# Altium PCB FRONT-UNIT-7_1.PcbDoc (part 2 of 3)
Units mm, origin at the board's own origin, x right, y up, seen from the top; angles counter-clockwise.
Board outline 280 x 128 mm, 2 copper layers (Top Layer, Top, Bottom Layer, Bottom), stack 1.671 mm thick; 140 components, 117 nets, 608 pads, 1302 vias.
Unrouted connection lines stored in the file: 26.
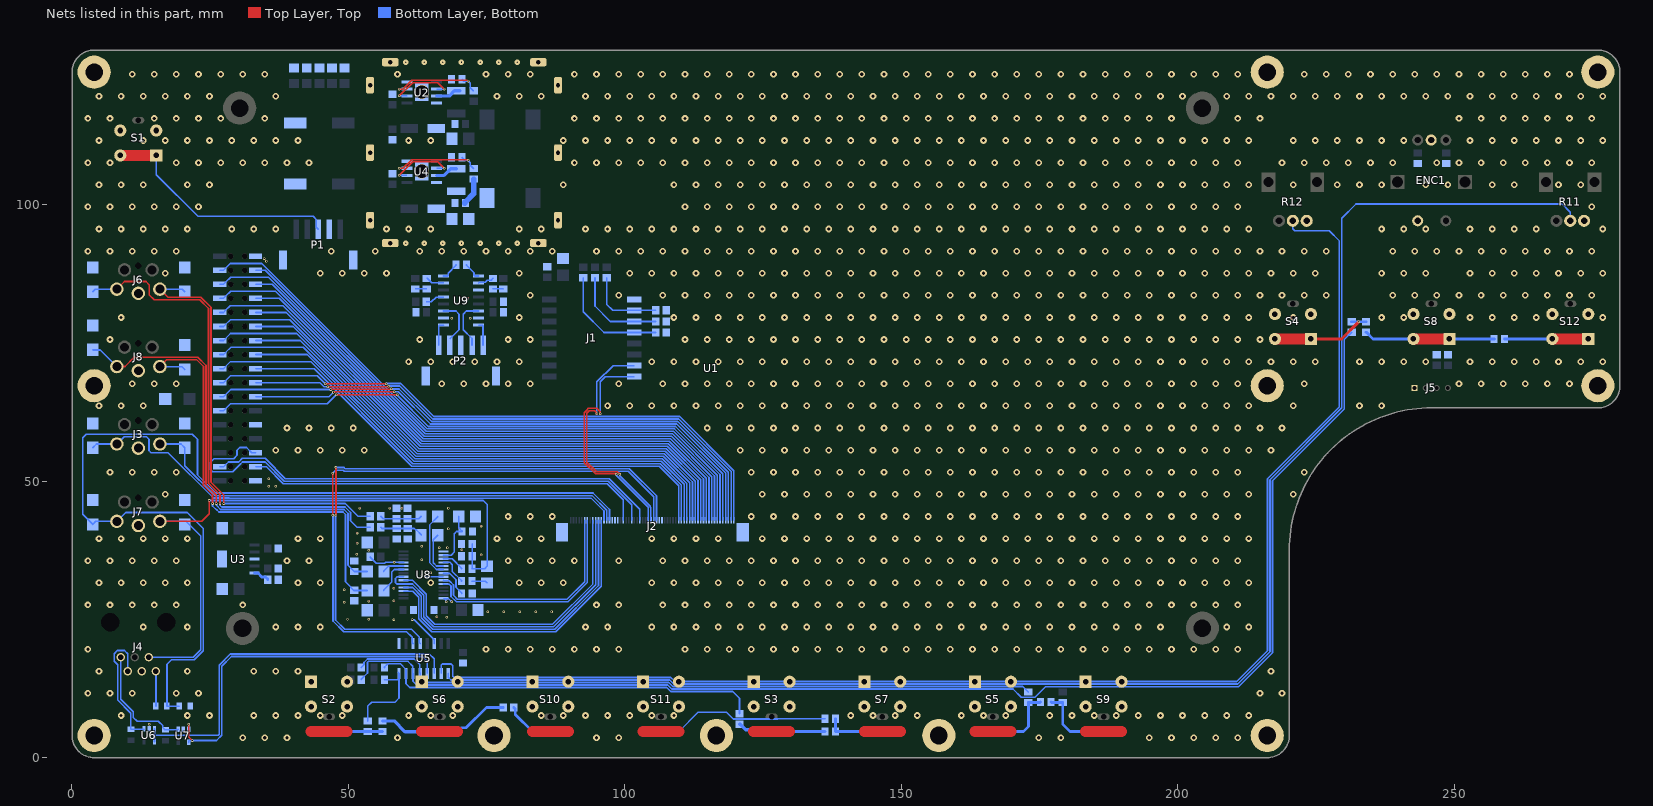
[diagram p2: the nets of this part, all layers, seen from the top]

## Via types
v1: diameter 1.2, hole 0.6, Top Layer, Top to Bottom Layer, Bottom, tented both sides, 1155 vias
v2: diameter 0.45, hole 0.25, Top Layer, Top to Bottom Layer, Bottom, tented both sides, 133 vias
v3: diameter 1, hole 0.25, Top Layer, Top to Bottom Layer, Bottom, tented both sides, 14 vias

## Nets (pads, with @x,y where several pads share a name; then routed paths per layer and width w, separated by ;. In a path a pad name is that pad's centre, name@x,y a point inside that pad or via, vN(x,y) a via of type N, cw(c..) or ccw(c..) an arc to the next point about the centre after c; other vN are vias at no path point) (continued)
GND: C1.2 C2.2 C3.2 C4.2 C5.2 C6.2 C7.2 C8.1 C9.1 C10.2 C11.2 C12.1 C13.1 C14.2 C15.1 C16.2 C17.2 C18.1 C19.1 C20.1 C21.2 C22.2 C23.1 C24.1 C25.1 C26.1 C27.1 C28.1 C29.1 C30.2 C31.2 C33.2 C34.1 C36.1 C37.1 C38.1 C39.2 C41.1 C42.2 C43.1 C46.2 C47.2 C50.2 C51.2 D1.2 D2.2 D3.2 D4.2 D5.2 D6.2 D7.2 D8.2 D9.2 ENC1.1 ENC1.4 J1.9 J2.27 J2.28 J2.43 J2.44 J2.45 J2.61 J2.62 J3.2 J4.3 J5.1 J6.2 J7.2 J8.2 P1.2 P1.MP1 P1.MP2 P2.3 P2.MP1 P2.MP2 pad. pad.7 R1.1 R6.2 R7.2 R8.2 R9.1 R11.3 R12.3 R32.1 R35.1 R36.1 R39.1 R40.1 R41.1 S1.3 S1.4 S2.3 S2.4 S3.3 S3.4 S4.3 S4.4 S5.3 S5.4 S6.3 S6.4 S7.3 S7.4 S8.3 S8.4 S9.3 S9.4 S10.3 S10.4 S11.3 S11.4 S12.3 S12.4 U1.2 U1.26 U1.34 U2.4 U2.8 U2.9 U3.3 U3.6 U4.4 U4.8 U4.9 U5.9 U5.14 U6.2 U7.2 U8.11 U8.15 U8.22 U8.28 U9.2 U9.9 U9.11 U9.15 | length 21.6
  Bottom Layer, Bottom w0.3: C38.1@53.959,36.334 53.959,36.234 55.039,35.154 56.546,35.154 56.723,35.331 v2(58.268,35.331) 58.269,35.333 59.982,35.333 U8.11@59.983,35.334 ; v2(61.519,24.994) 61.547,24.965 61.9,24.965 65.507,21.358 U5.14@65.507,20.658 ; 64.135,32.791 64.192,32.734 U8.22@67.183,32.734 ; U8.28@67.233,28.784 U8.28@67.633,28.784 ; v2(67.716,28.194) 67.716,28.235 67.633,28.318 U8.28@67.633,28.784 ; v2(68.682,28.194) 68.091,28.784 U8.28@67.633,28.784 ; C51.2@71.356,89.154 71.356,89.054 72.712,87.698 72.712,87.296 72.862,87.146 U9.9@73.562,87.146
  other v1: 30.881,3.638 34.881,3.638 38.881,3.638 58.881,3.638 94.881,3.638 98.881,3.638 174.881,3.638 178.881,3.638 194.881,3.638 198.881,3.638 202.881,3.638 206.881,3.638 210.881,3.638 8.881,7.638 20.881,7.638 24.881,7.638 32.881,7.638 36.881,7.638 40.881,7.638 44.881,7.638 48.881,7.638 60.881,7.638 64.881,7.638 68.881,7.638 84.881,7.638 88.881,7.638 92.881,7.638 96.881,7.638 100.881,7.638 104.881,7.638 108.881,7.638 140.881,7.638 144.881,7.638 148.881,7.638 152.881,7.638 160.881,7.638 164.881,7.638 168.881,7.638 176.881,7.638 180.881,7.638 184.881,7.638 188.881,7.638 192.881,7.638 196.881,7.638 200.881,7.638 204.881,7.638 208.881,7.638 212.881,7.638 2.881,11.638 6.881,11.638 10.881,11.638 18.881,11.638 22.881,11.638 214.881,11.638 218.881,11.638 4.881,15.638 20.881,15.638 32.881,15.638 36.881,15.638 40.881,15.638 216.881,15.638 2.881,19.638 74.881,19.638 78.881,19.638 82.881,19.638 86.881,19.638 90.881,19.638 94.881,19.638 98.881,19.638 110.881,19.638 114.881,19.638 118.881,19.638 122.881,19.638 126.881,19.638 130.881,19.638 134.881,19.638 138.881,19.638 142.881,19.638 146.881,19.638 150.881,19.638 154.881,19.638 158.881,19.638 162.881,19.638 166.881,19.638 170.881,19.638 174.881,19.638 178.881,19.638 182.881,19.638 186.881,19.638 190.881,19.638 194.881,19.638 198.881,19.638 202.881,19.638 206.881,19.638 210.881,19.638 12.881,23.638 20.881,23.638 36.881,23.638 40.881,23.638 44.881,23.638 92.881,23.638 96.881,23.638 104.881,23.638 108.881,23.638 112.881,23.638 116.881,23.638 120.881,23.638 124.881,23.638 128.881,23.638 132.881,23.638 136.881,23.638 140.881,23.638 144.881,23.638 148.881,23.638 152.881,23.638 156.881,23.638 160.881,23.638 164.881,23.638 168.881,23.638 172.881,23.638 176.881,23.638 180.881,23.638 184.881,23.638 188.881,23.638 192.881,23.638 196.881,23.638 208.881,23.638 212.881,23.638 2.881,27.638 6.881,27.638 10.881,27.638 14.881,27.638 18.881,27.638 30.881,27.638 94.881,27.638 98.881,27.638 106.881,27.638 110.881,27.638 114.881,27.638 118.881,27.638 122.881,27.638 126.881,27.638 130.881,27.638 134.881,27.638 138.881,27.638 142.881,27.638 146.881,27.638 150.881,27.638 154.881,27.638 158.881,27.638 162.881,27.638 166.881,27.638 170.881,27.638 174.881,27.638 178.881,27.638 182.881,27.638 186.881,27.638 190.881,27.638 194.881,27.638 198.881,27.638 202.881,27.638 206.881,27.638 210.881,27.638 4.881,31.638 8.881,31.638 12.881,31.638 16.881,31.638 20.881,31.638 40.881,31.638 44.881,31.638 64.881,31.638 80.881,31.638 84.881,31.638 88.881,31.638 104.881,31.638 108.881,31.638 112.881,31.638 116.881,31.638 120.881,31.638 124.881,31.638 128.881,31.638 132.881,31.638 136.881,31.638 140.881,31.638 144.881,31.638 148.881,31.638 152.881,31.638 156.881,31.638 160.881,31.638 164.881,31.638 168.881,31.638 172.881,31.638 176.881,31.638 180.881,31.638 184.881,31.638 188.881,31.638 192.881,31.638 196.881,31.638 200.881,31.638 204.881,31.638 208.881,31.638 212.881,31.638 2.881,35.638 6.881,35.638 10.881,35.638 14.881,35.638 18.881,35.638 38.881,35.638 42.881,35.638 78.881,35.638 82.881,35.638 86.881,35.638 90.881,35.638 98.881,35.638 106.881,35.638 110.881,35.638 114.881,35.638 118.881,35.638 122.881,35.638 126.881,35.638 130.881,35.638 134.881,35.638 138.881,35.638 142.881,35.638 146.881,35.638 150.881,35.638 154.881,35.638 158.881,35.638 162.881,35.638 166.881,35.638 170.881,35.638 174.881,35.638 178.881,35.638 182.881,35.638 186.881,35.638 190.881,35.638 194.881,35.638 198.881,35.638 202.881,35.638 206.881,35.638 210.881,35.638 4.881,39.638 8.881,39.638 12.881,39.638 16.881,39.638 20.881,39.638 40.881,39.638 44.881,39.638 76.881,39.638 80.881,39.638 84.881,39.638 104.881,39.638 108.881,39.638 112.881,39.638 116.881,39.638 124.881,39.638 128.881,39.638 132.881,39.638 136.881,39.638 140.881,39.638 144.881,39.638 148.881,39.638 152.881,39.638 156.881,39.638 160.881,39.638 164.881,39.638 168.881,39.638 172.881,39.638 176.881,39.638 180.881,39.638 184.881,39.638 188.881,39.638 192.881,39.638 196.881,39.638 200.881,39.638 204.881,39.638 208.881,39.638 212.881,39.638 78.881,43.638 82.881,43.638 86.881,43.638 122.881,43.638 126.881,43.638 130.881,43.638 134.881,43.638 138.881,43.638 142.881,43.638 146.881,43.638 150.881,43.638 154.881,43.638 158.881,43.638 162.881,43.638 166.881,43.638 170.881,43.638 174.881,43.638 178.881,43.638 182.881,43.638 186.881,43.638 190.881,43.638 194.881,43.638 198.881,43.638 202.881,43.638 206.881,43.638 210.881,43.638 16.881,47.638 124.881,47.638 128.881,47.638 132.881,47.638 136.881,47.638 140.881,47.638 144.881,47.638 148.881,47.638 152.881,47.638 156.881,47.638 160.881,47.638 164.881,47.638 168.881,47.638 172.881,47.638 176.881,47.638 180.881,47.638 184.881,47.638 188.881,47.638 192.881,47.638 196.881,47.638 200.881,47.638 204.881,47.638 208.881,47.638 212.881,47.638 220.881,47.638 6.881,51.638 10.881,51.638 14.881,51.638 18.881,51.638 122.881,51.638 126.881,51.638 130.881,51.638 134.881,51.638 138.881,51.638 142.881,51.638 146.881,51.638 150.881,51.638 154.881,51.638 158.881,51.638 162.881,51.638 166.881,51.638 170.881,51.638 174.881,51.638 178.881,51.638 182.881,51.638 186.881,51.638 190.881,51.638 194.881,51.638 198.881,51.638 202.881,51.638 206.881,51.638 210.881,51.638 222.881,51.638 36.881,55.638 40.881,55.638 44.881,55.638 48.881,55.638 52.881,55.638 120.881,55.638 124.881,55.638 128.881,55.638 132.881,55.638 136.881,55.638 140.881,55.638 144.881,55.638 148.881,55.638 152.881,55.638 156.881,55.638 160.881,55.638 164.881,55.638 168.881,55.638 172.881,55.638 176.881,55.638 180.881,55.638 184.881,55.638 188.881,55.638 192.881,55.638 196.881,55.638 200.881,55.638 204.881,55.638 208.881,55.638 212.881,55.638 216.881,55.638 38.881,59.638 42.881,59.638 46.881,59.638 50.881,59.638 114.881,59.638 118.881,59.638 122.881,59.638 126.881,59.638 130.881,59.638 134.881,59.638 138.881,59.638 142.881,59.638 146.881,59.638 150.881,59.638 154.881,59.638 158.881,59.638 162.881,59.638 166.881,59.638 170.881,59.638 174.881,59.638 178.881,59.638 182.881,59.638 186.881,59.638 190.881,59.638 194.881,59.638 198.881,59.638 202.881,59.638 206.881,59.638 210.881,59.638 214.881,59.638 218.881,59.638 4.881,63.638 8.881,63.638 12.881,63.638 96.881,63.638 100.881,63.638 104.881,63.638 108.881,63.638 112.881,63.638 116.881,63.638 120.881,63.638 124.881,63.638 128.881,63.638 132.881,63.638 136.881,63.638 140.881,63.638 144.881,63.638 148.881,63.638 152.881,63.638 156.881,63.638 160.881,63.638 164.881,63.638 168.881,63.638 172.881,63.638 176.881,63.638 180.881,63.638 184.881,63.638 188.881,63.638 192.881,63.638 196.881,63.638 200.881,63.638 204.881,63.638 208.881,63.638 212.881,63.638 220.881,63.638 232.881,63.638 236.881,63.638 10.881,67.638 14.881,67.638 18.881,67.638 66.881,67.638 70.881,67.638 74.881,67.638 78.881,67.638 82.881,67.638 98.881,67.638 106.881,67.638 110.881,67.638 114.881,67.638 118.881,67.638 122.881,67.638 126.881,67.638 130.881,67.638 134.881,67.638 138.881,67.638 142.881,67.638 146.881,67.638 150.881,67.638 154.881,67.638 158.881,67.638 162.881,67.638 166.881,67.638 170.881,67.638 174.881,67.638 178.881,67.638 182.881,67.638 186.881,67.638 190.881,67.638 194.881,67.638 198.881,67.638 202.881,67.638 206.881,67.638 210.881,67.638 222.881,67.638 250.881,67.638 254.881,67.638 258.881,67.638 262.881,67.638 266.881,67.638 270.881,67.638 60.881,71.638 64.881,71.638 68.881,71.638 72.881,71.638 76.881,71.638 80.881,71.638 104.881,71.638 108.881,71.638 112.881,71.638 116.881,71.638 120.881,71.638 124.881,71.638 128.881,71.638 132.881,71.638 136.881,71.638 140.881,71.638 144.881,71.638 148.881,71.638 152.881,71.638 156.881,71.638 160.881,71.638 164.881,71.638 168.881,71.638 172.881,71.638 176.881,71.638 180.881,71.638 184.881,71.638 188.881,71.638 192.881,71.638 196.881,71.638 200.881,71.638 204.881,71.638 208.881,71.638 212.881,71.638 216.881,71.638 220.881,71.638 224.881,71.638 232.881,71.638 236.881,71.638 240.881,71.638 244.881,71.638 252.881,71.638 256.881,71.638 260.881,71.638 264.881,71.638 268.881,71.638 272.881,71.638 276.881,71.638 6.881,75.638 62.881,75.638 78.881,75.638 82.881,75.638 110.881,75.638 114.881,75.638 118.881,75.638 122.881,75.638 126.881,75.638 130.881,75.638 134.881,75.638 138.881,75.638 142.881,75.638 146.881,75.638 150.881,75.638 154.881,75.638 158.881,75.638 162.881,75.638 166.881,75.638 170.881,75.638 174.881,75.638 178.881,75.638 182.881,75.638 186.881,75.638 190.881,75.638 194.881,75.638 198.881,75.638 202.881,75.638 206.881,75.638 210.881,75.638 214.881,75.638 8.881,79.638 80.881,79.638 108.881,79.638 112.881,79.638 116.881,79.638 120.881,79.638 124.881,79.638 128.881,79.638 132.881,79.638 136.881,79.638 140.881,79.638 144.881,79.638 148.881,79.638 152.881,79.638 156.881,79.638 160.881,79.638 164.881,79.638 168.881,79.638 172.881,79.638 176.881,79.638 180.881,79.638 184.881,79.638 188.881,79.638 192.881,79.638 196.881,79.638 200.881,79.638 204.881,79.638 208.881,79.638 212.881,79.638 220.881,79.638 236.881,79.638 240.881,79.638 252.881,79.638 256.881,79.638 260.881,79.638 264.881,79.638 276.881,79.638 82.881,83.638 98.881,83.638 106.881,83.638 110.881,83.638 114.881,83.638 118.881,83.638 122.881,83.638 126.881,83.638 130.881,83.638 134.881,83.638 138.881,83.638 142.881,83.638 146.881,83.638 150.881,83.638 154.881,83.638 158.881,83.638 162.881,83.638 166.881,83.638 170.881,83.638 174.881,83.638 178.881,83.638 182.881,83.638 186.881,83.638 190.881,83.638 194.881,83.638 198.881,83.638 202.881,83.638 206.881,83.638 210.881,83.638 214.881,83.638 218.881,83.638 222.881,83.638 226.881,83.638 238.881,83.638 242.881,83.638 246.881,83.638 250.881,83.638 254.881,83.638 258.881,83.638 262.881,83.638 266.881,83.638 270.881,83.638 274.881,83.638 16.881,87.638 44.881,87.638 48.881,87.638 52.881,87.638 56.881,87.638 80.881,87.638 100.881,87.638 104.881,87.638 108.881,87.638 112.881,87.638 116.881,87.638 120.881,87.638 124.881,87.638 128.881,87.638 132.881,87.638 136.881,87.638 140.881,87.638 144.881,87.638 148.881,87.638 152.881,87.638 156.881,87.638 160.881,87.638 164.881,87.638 168.881,87.638 172.881,87.638 176.881,87.638 180.881,87.638 184.881,87.638 188.881,87.638 192.881,87.638 196.881,87.638 200.881,87.638 204.881,87.638 208.881,87.638 212.881,87.638 216.881,87.638 220.881,87.638 224.881,87.638 236.881,87.638 240.881,87.638 244.881,87.638 252.881,87.638 256.881,87.638 260.881,87.638 264.881,87.638 268.881,87.638 272.881,87.638 276.881,87.638 2.881,91.638 6.881,91.638 10.881,91.638 14.881,91.638 18.881,91.638 46.881,91.638 54.881,91.638 62.881,91.638 66.881,91.638 70.881,91.638 74.881,91.638 78.881,91.638 82.881,91.638 86.881,91.638 94.881,91.638 98.881,91.638 102.881,91.638 106.881,91.638 110.881,91.638 114.881,91.638 118.881,91.638 122.881,91.638 126.881,91.638 130.881,91.638 134.881,91.638 138.881,91.638 142.881,91.638 146.881,91.638 150.881,91.638 154.881,91.638 158.881,91.638 162.881,91.638 166.881,91.638 170.881,91.638 174.881,91.638 178.881,91.638 182.881,91.638 186.881,91.638 190.881,91.638 194.881,91.638 198.881,91.638 202.881,91.638 206.881,91.638 210.881,91.638 214.881,91.638 218.881,91.638 222.881,91.638 226.881,91.638 238.881,91.638 242.881,91.638 246.881,91.638 250.881,91.638 254.881,91.638 258.881,91.638 262.881,91.638 266.881,91.638 270.881,91.638 274.881,91.638 4.881,95.638 8.881,95.638 12.881,95.638 16.881,95.638 20.881,95.638 28.881,95.638 32.881,95.638 36.881,95.638 56.881,95.638 60.881,95.638 64.881,95.638 80.881,95.638 84.881,95.638 92.881,95.638 96.881,95.638 100.881,95.638 104.881,95.638 108.881,95.638 112.881,95.638 116.881,95.638 120.881,95.638 124.881,95.638 128.881,95.638 132.881,95.638 136.881,95.638 140.881,95.638 144.881,95.638 148.881,95.638 152.881,95.638 156.881,95.638 160.881,95.638 164.881,95.638 168.881,95.638 172.881,95.638 176.881,95.638 180.881,95.638 184.881,95.638 188.881,95.638 192.881,95.638 196.881,95.638 200.881,95.638 204.881,95.638 208.881,95.638 212.881,95.638 236.881,95.638 240.881,95.638 244.881,95.638 252.881,95.638 256.881,95.638 260.881,95.638 264.881,95.638 276.881,95.638 2.881,99.638 6.881,99.638 10.881,99.638 14.881,99.638 18.881,99.638 22.881,99.638 110.881,99.638 114.881,99.638 118.881,99.638 122.881,99.638 126.881,99.638 130.881,99.638 134.881,99.638 138.881,99.638 142.881,99.638 146.881,99.638 150.881,99.638 154.881,99.638 158.881,99.638 162.881,99.638 166.881,99.638 170.881,99.638 174.881,99.638 178.881,99.638 182.881,99.638 186.881,99.638 190.881,99.638 194.881,99.638 198.881,99.638 202.881,99.638 206.881,99.638 210.881,99.638 274.881,99.638 4.881,103.638 8.881,103.638 12.881,103.638 20.881,103.638 24.881,103.638 88.881,103.638 108.881,103.638 112.881,103.638 116.881,103.638 120.881,103.638 124.881,103.638 128.881,103.638 132.881,103.638 136.881,103.638 140.881,103.638 144.881,103.638 148.881,103.638 152.881,103.638 156.881,103.638 160.881,103.638 164.881,103.638 168.881,103.638 172.881,103.638 176.881,103.638 180.881,103.638 184.881,103.638 188.881,103.638 192.881,103.638 196.881,103.638 200.881,103.638 204.881,103.638 208.881,103.638 212.881,103.638 220.881,103.638 228.881,103.638 232.881,103.638 236.881,103.638 244.881,103.638 248.881,103.638 256.881,103.638 260.881,103.638 268.881,103.638 272.881,103.638 2.881,107.638 6.881,107.638 18.881,107.638 22.881,107.638 26.881,107.638 30.881,107.638 34.881,107.638 38.881,107.638 42.881,107.638 90.881,107.638 94.881,107.638 98.881,107.638 102.881,107.638 106.881,107.638 110.881,107.638 114.881,107.638 118.881,107.638 122.881,107.638 126.881,107.638 130.881,107.638 134.881,107.638 138.881,107.638 142.881,107.638 146.881,107.638 150.881,107.638 154.881,107.638 158.881,107.638 162.881,107.638 166.881,107.638 170.881,107.638 174.881,107.638 178.881,107.638 182.881,107.638 186.881,107.638 190.881,107.638 194.881,107.638 198.881,107.638 202.881,107.638 206.881,107.638 210.881,107.638 218.881,107.638 222.881,107.638 226.881,107.638 230.881,107.638 234.881,107.638 238.881,107.638 246.881,107.638 250.881,107.638 254.881,107.638 258.881,107.638 262.881,107.638 266.881,107.638 270.881,107.638 274.881,107.638 4.881,111.638 12.881,111.638 16.881,111.638 20.881,111.638 24.881,111.638 28.881,111.638 32.881,111.638 36.881,111.638 40.881,111.638 60.881,111.638 64.881,111.638 88.881,111.638 92.881,111.638 96.881,111.638 100.881,111.638 104.881,111.638 108.881,111.638 112.881,111.638 116.881,111.638 120.881,111.638 124.881,111.638 128.881,111.638 132.881,111.638 136.881,111.638 140.881,111.638 144.881,111.638 148.881,111.638 152.881,111.638 156.881,111.638 160.881,111.638 164.881,111.638 168.881,111.638 172.881,111.638 176.881,111.638 180.881,111.638 184.881,111.638 188.881,111.638 192.881,111.638 196.881,111.638 200.881,111.638 204.881,111.638 208.881,111.638 212.881,111.638 220.881,111.638 224.881,111.638 228.881,111.638 232.881,111.638 236.881,111.638 240.881,111.638 252.881,111.638 256.881,111.638 260.881,111.638 264.881,111.638 268.881,111.638 272.881,111.638 276.881,111.638 2.881,115.638 6.881,115.638 14.881,115.638 18.881,115.638 22.881,115.638 26.881,115.638 34.881,115.638 90.881,115.638 94.881,115.638 98.881,115.638 102.881,115.638 106.881,115.638 110.881,115.638 114.881,115.638 118.881,115.638 122.881,115.638 126.881,115.638 130.881,115.638 134.881,115.638 138.881,115.638 142.881,115.638 146.881,115.638 150.881,115.638 154.881,115.638 158.881,115.638 162.881,115.638 166.881,115.638 170.881,115.638 174.881,115.638 178.881,115.638 182.881,115.638 186.881,115.638 190.881,115.638 194.881,115.638 198.881,115.638 210.881,115.638 214.881,115.638 250.881,115.638 254.881,115.638 258.881,115.638 262.881,115.638 266.881,115.638 270.881,115.638 274.881,115.638 4.881,119.638 8.881,119.638 12.881,119.638 16.881,119.638 20.881,119.638 24.881,119.638 36.881,119.638 76.881,119.638 80.881,119.638 84.881,119.638 92.881,119.638 96.881,119.638 100.881,119.638 104.881,119.638 108.881,119.638 112.881,119.638 116.881,119.638 120.881,119.638 124.881,119.638 128.881,119.638 132.881,119.638 136.881,119.638 140.881,119.638 144.881,119.638 148.881,119.638 152.881,119.638 156.881,119.638 160.881,119.638 164.881,119.638 168.881,119.638 172.881,119.638 176.881,119.638 180.881,119.638 184.881,119.638 188.881,119.638 192.881,119.638 196.881,119.638 200.881,119.638 208.881,119.638 212.881,119.638 216.881,119.638 220.881,119.638 224.881,119.638 228.881,119.638 232.881,119.638 236.881,119.638 240.881,119.638 244.881,119.638 248.881,119.638 252.881,119.638 256.881,119.638 260.881,119.638 264.881,119.638 268.881,119.638 272.881,119.638 276.881,119.638 10.881,123.638 14.881,123.638 18.881,123.638 22.881,123.638 26.881,123.638 30.881,123.638 34.881,123.638 58.881,123.638 74.881,123.638 78.881,123.638 82.881,123.638 90.881,123.638 94.881,123.638 98.881,123.638 102.881,123.638 106.881,123.638 110.881,123.638 114.881,123.638 118.881,123.638 122.881,123.638 126.881,123.638 130.881,123.638 134.881,123.638 138.881,123.638 142.881,123.638 146.881,123.638 150.881,123.638 154.881,123.638 158.881,123.638 162.881,123.638 166.881,123.638 170.881,123.638 174.881,123.638 178.881,123.638 182.881,123.638 186.881,123.638 190.881,123.638 194.881,123.638 198.881,123.638 202.881,123.638 206.881,123.638 210.881,123.638 222.881,123.638 226.881,123.638 230.881,123.638 234.881,123.638 238.881,123.638 242.881,123.638 246.881,123.638 250.881,123.638 254.881,123.638 258.881,123.638 262.881,123.638 266.881,123.638 270.881,123.638
  other v2: 13.995,6.071 58.242,24.994 49.835,25.019 53.696,25.019 67.793,25.375 66.015,25.476 75.235,26.416 78.111,26.416 80.988,26.416 83.864,26.416 86.741,26.416 49.251,28.143 53.696,28.346 58.242,28.372 49.251,30.353 58.242,30.632 63.297,32.918 64.897,33.426 63.297,35.789 74.016,36.678 51.537,36.779 53.67,37.541 70.536,37.617 66.421,37.948 67.92,37.948 63.297,38.252 51.562,38.811 51.562,40.64 68.097,41.402 73.99,41.91 59.69,45.136 68.097,45.136 52.019,45.161 57.48,45.161 35.585,49.098 36.855,49.098 35.585,50.495 68.707,79.502 72.06,79.502 71.628,83.083 35.179,89.814 34.798,90.297
  other v3: 60.339,93.091 63.71,93.091 67.08,93.091 70.451,93.091 73.822,93.091 77.193,93.091 80.564,93.091 60.339,125.808 63.71,125.808 67.08,125.808 70.451,125.808 73.822,125.808 77.193,125.808 80.564,125.808
HEADPHONE_L: C44.2 D9.1 J8.3 R40.2 | length 81.1
  Top Layer, Top w0.3: J8.3@15.9,70.75 17.166,72.016 22.536,72.016 23.796,70.756 23.796,49.25 25.425,47.621 v2(25.425,45.974)
  Bottom Layer, Bottom w0.3: J8.3@15.9,70.75 19.875,70.75 D9.1@20.4,70.225 ; v2(25.425,45.974) 25.425,45.542 26.162,44.806 26.237,44.806 26.585,44.457 49.015,44.457 49.479,43.993 49.479,31.838 50.433,30.884 50.433,30.784 50.983,30.234 C44.2@53.408,30.234
HEADPHONE_R: C45.2 D8.1 J8.6 R41.2 | length 86.9
  Top Layer, Top w0.3: J8.6@8.1,70.75 8.128,70.778 9.589,70.778 11.278,72.466 22.722,72.466 24.246,70.942 24.246,49.437 26.111,47.571 v2(26.111,45.974)
  Bottom Layer, Bottom w0.3: D8.1@3.759,73.797 3.814,73.742 5.108,73.742 J8.6@8.1,70.75 ; v2(26.111,45.974) 26.14,45.945 26.14,45.639 26.872,44.907 49.201,44.907 49.929,44.179 49.929,34.813 R41.2@51.046,33.697 ; R41.2@51.033,33.709 51.058,33.684 C45.2@53.408,33.684
KEY_IN_DASH: D2.1 J2.48 J3.6 | length 101.7
  Bottom Layer, Bottom w0.3: D2.1@3.75,56.075 4.425,56.75 J3.6@8.1,56.75 9.425,58.075 13.475,58.075 13.925,57.625 13.925,55.575 14.365,55.135 17.433,55.135 25.603,46.965 28.397,46.965 ; 28.397,46.965 93.885,46.965 96.225,44.625 J2.48@96.225,42.962
KEY_IN_DOT: D3.1 J2.47 J3.3 | length 89.5
  Bottom Layer, Bottom w0.3: J3.3@15.9,56.75 19.725,56.75 D3.1@20.4,56.075 20.4,52.814 25.799,47.415 94.071,47.415 96.725,44.761 J2.47@96.725,42.962
L+: P2.5 U9.1 | length 4.4
  Bottom Layer, Bottom w0.3: P2.5@66.358,74.582 66.358,78.102 66.512,78.256 U9.1@67.212,78.256
L-: P2.4 U9.3 | length 8.1
  Bottom Layer, Bottom w0.3: U9.3@67.213,80.797 69.45,80.797 70.009,80.239 70.009,77.426 P2.4@68.416,75.832
LINEIN_L: D6.1 J6.3 R33.1 | length 79.2
  Top Layer, Top w0.3: J6.3@15.9,84.75 17.363,83.287 23.317,83.287 25.146,81.458 25.146,49.809 27.432,47.523 v2(27.432,45.974)
  Bottom Layer, Bottom w0.3: J6.3@15.9,84.75 19.925,84.75 D6.1@20.4,84.275 ; v2(27.432,45.974) 49.407,45.974 51.722,43.659 R33.1@53.933,43.659
LINEIN_R: D5.1 J6.6 R34.1 | length 90.9
  Top Layer, Top w0.3: J6.6@8.1,84.75 9.481,86.131 13.386,86.131 13.995,85.522 13.995,83.693 14.859,82.829 23.121,82.829 24.696,81.255 24.696,49.623 26.772,47.547 v2(26.772,45.974)
  Bottom Layer, Bottom w0.3: D5.1@3.75,84.275 4.225,84.75 J6.6@8.1,84.75 ; v2(26.772,45.974) 26.772,45.644 27.058,45.357 49.388,45.357 50.379,44.366 50.379,42.89 51.56,41.709 R34.1@53.933,41.709
MIC: C40.2 C43.2 D7.1 J4.2 J7.3 R38.1 R39.2 | length 120
  Top Layer, Top w0.3: J7.3@15.9,42.75 23.471,42.75 24.841,44.12 v2(24.841,46.533)
  Bottom Layer, Bottom w0.3: J4.2@13.894,18.182 21.924,18.182 23.275,19.533 23.275,40.1 20.625,42.75 J7.3@15.9,42.75 ; v2(24.841,46.533) 24.859,46.515 74.415,46.515 75.082,45.847 C40.2@75.082,34.635 ; R39.2@72.383,38.669 72.383,34.214 R38.1@72.358,34.189 74.638,34.189 C40.2@75.083,34.634
MISO: J2.29 U5.12 | length 109.8
  Top Layer, Top w0.3: v2(47.752,43.891) v2(47.752,52.5)
  Bottom Layer, Bottom w0.3: v2(47.752,43.891) 47.752,43.851 47.669,43.767 47.669,24.923 49.344,23.248 61.41,23.248 62.817,21.842 62.817,20.808 U5.12@62.967,20.658 ; v2(47.752,52.5) 49.202,52.5 49.427,52.275 100.809,52.275 105.725,47.359 J2.29@105.725,42.962
MOSI: J2.30 U5.11 | length 108
  Top Layer, Top w0.3: v2(47.142,43.891) v2(47.142,51.45)
  Bottom Layer, Bottom w0.3: v2(47.142,43.891) 47.142,43.851 47.219,43.774 47.219,24.737 49.157,22.798 60.514,22.798 61.547,21.765 61.547,20.808 U5.11@61.697,20.658 ; v2(47.142,51.45) 47.667,51.975 49.077,51.975 49.227,51.825 50.597,51.825 100.623,51.825 105.225,47.223 J2.30@105.225,42.962
NetC19_2: C19.2 U3.5 | length 2.9
  Bottom Layer, Bottom w0.5: U3.5@33.024,33.401 33.624,33.401 34.318,32.707 35,32.707 35.4,32.307 C19.2@35.4,32.207
NetC22_1: C22.1 C23.2 L3.2 L4.2 R10.2 | length 5
  Bottom Layer, Bottom w1: C23.2@71.076,100.33 71.076,100.43 72.669,102.023 R10.2@72.669,104.663
NetC32_1: C32.1 U8.20 | length 12
  Bottom Layer, Bottom w0.3: C32.1@66.158,43.659 66.158,43.559 64.683,42.084 64.683,35.298 65.947,34.034 U8.20@67.183,34.034
NetC32_2: C32.2 C37.2 R33.2 R36.2 | length 7.7
  Bottom Layer, Bottom w0.3: R33.2@55.833,43.659 56.283,43.209 C37.2@60.683,43.209 62.708,43.209 C32.2@63.158,43.659
NetC35_1: C35.1 U8.19 | length 7.4
  Bottom Layer, Bottom w0.3: C35.1@66.158,40.234 65.358,39.434 65.358,35.259 65.933,34.684 U8.19@67.183,34.684
NetC35_2: C35.2 C36.2 R34.2 R35.2 | length 8
  Bottom Layer, Bottom w0.3: R34.2@55.833,41.709 56.083,41.46 C36.2@58.733,41.46 61.933,41.46 62.208,41.184 62.308,41.184 63.158,40.334 C35.2@63.158,40.234
NetC40_1: C40.1 R37.1 | length 2.9
  Bottom Layer, Bottom w0.3: R37.1@72.358,31.949 74.768,31.949 C40.1@75.083,31.634
NetC41_2: C41.2 C42.1 U8.16 | length 10
  Bottom Layer, Bottom w0.3: U8.16@67.183,36.634 68.583,36.634 69.158,37.209 69.158,40.509 69.558,40.909 C41.2@70.533,40.909 70.533,41.009 69.958,41.584 C42.1@69.958,43.659
NetC44_1: C44.1 U8.9 | length 6.3
  Bottom Layer, Bottom w0.3: C44.1@56.408,30.234 56.408,30.334 57.808,31.734 57.808,33.559 58.283,34.034 U8.9@59.983,34.034
NetC45_1: C45.1 U8.10 | length 4
  Bottom Layer, Bottom w0.3: C45.1@56.408,33.684 56.408,33.784 57.308,34.684 U8.10@59.983,34.684
NetC48_1: C48.1 R43.2 | length 2.1
  Bottom Layer, Bottom w0.254: C48.1@62.103,84.8 R43.2@64.16,84.8
NetC49_1: C49.1 R44.2 | length 1.9
  Bottom Layer, Bottom w0.3: R44.2@76.149,84.8 C49.1@78.029,84.8
NetC51_1: C51.1 U9.8 | length 3.3
  Bottom Layer, Bottom w0.3: U9.8@67.212,87.146 67.912,87.146 68.062,87.296 68.062,87.66 69.456,89.054 C51.1@69.456,89.154
NetJ1_10: J1.10 R3.2 R6.1 | length 14.1
  Bottom Layer, Bottom w0.3: R3.2@96.749,86.832 96.749,81.991 97.815,80.924 R6.1@105.578,80.924
NetJ1_11: J1.11 R4.2 R7.1 | length 17.3
  Bottom Layer, Bottom w0.3: R4.2@94.602,86.832 94.602,81.699 97.384,78.918 R7.1@105.578,78.918
NetJ1_12: J1.12 R5.2 R8.1 | length 20.8
  Bottom Layer, Bottom w0.3: R5.2@92.456,86.832 92.456,80.67 96.215,76.911 R8.1@105.578,76.911
NetJ1_15: J1.15 J2.31 | length 42.4
  Top Layer, Top w0.254: v2(94.961,62.25) 94.961,62.303 94.863,62.401 94.863,62.458 94.532,62.789 93.59,62.789 93.155,62.354 93.155,53.479 94.875,51.759 98.658,51.759 99.085,51.332 v2(99.085,51.3)
  Bottom Layer, Bottom w0.254: v2(94.961,62.25) 94.961,67.986 97.895,70.921 J1.15@101.705,70.921 ; v2(99.085,51.3) 99.123,51.262 99.123,51.001 104.629,45.495 104.629,45.282 104.725,45.186 J2.31@104.725,42.962
NetJ1_16: J1.16 J2.32 | length 42.5
  Top Layer, Top w0.254: v2(95.561,62.25) 95.526,62.285 95.526,62.564 94.897,63.193 93.423,63.193 93.088,62.858 93.083,62.858 92.653,62.428 92.653,53.397 94.695,51.355 98.299,51.355 98.397,51.257 v2(98.45,51.257)
  Bottom Layer, Bottom w0.254: v2(95.561,62.25) 95.561,68.015 96.467,68.921 J1.16@101.705,68.921 ; v2(98.45,51.257) 98.488,51.22 98.488,51.064 104.225,45.327 J2.32@104.225,42.962
NetJ2_1: J2.1 U1.19 | length 109.7
  Top Layer, Top w0.3: v2(45.796,67.64) 45.813,67.657 v2(56.845,67.657)
  Bottom Layer, Bottom w0.3: U1.19@26.713,67.842 27.413,67.842 27.783,68.212 27.783,68.215 28.668,69.1 44.336,69.1 v2(45.796,67.64) ; v2(56.845,67.657) 56.874,67.686 57.102,67.686 57.108,67.691 59.452,67.691 65.418,61.725 109.925,61.725 119.725,51.925 J2.1@119.725,42.962
NetJ2_2: J2.2 U1.20 | length 101.6
  Top Layer, Top w0.3: v2(46.279,67.132) 57.25,67.132 57.284,67.166 v2(57.325,67.166)
  Bottom Layer, Bottom w0.3: U1.20@33.213,67.842 44.852,67.842 45.579,67.115 46.262,67.115 v2(46.279,67.132) ; v2(57.325,67.166) 57.354,67.195 57.525,67.195 57.565,67.234 59.272,67.234 65.232,61.275 109.739,61.275 119.225,51.789 J2.2@119.225,42.962
NetJ2_3: J2.3 U1.21 | length 107.5
  Top Layer, Top w0.3: v2(46.838,66.599) 46.866,66.627 47.064,66.627 47.077,66.641 57.674,66.641 57.742,66.709 v2(57.782,66.709)
  Bottom Layer, Bottom w0.3: U1.21@26.713,65.302 27.413,65.302 27.783,65.672 27.783,65.675 28.708,66.6 v2(46.838,66.599) v2(46.838,66.599) ; v2(57.782,66.709) 59.161,66.709 65.045,60.825 109.552,60.825 118.725,51.652 J2.3@118.725,42.962
NetJ2_4: J2.4 U1.22 | length 100
  Top Layer, Top w0.3: v2(47.295,66.116) 47.323,66.145 47.546,66.145 47.585,66.184 v2(58.307,66.184)
  Bottom Layer, Bottom w0.3: U1.22@33.213,65.302 46.481,65.302 v2(47.295,66.116) ; v2(58.307,66.184) 58.333,66.21 59.024,66.21 64.859,60.375 109.366,60.375 118.225,51.516 J2.4@118.225,42.962
NetJ2_5: J2.5 U1.23 | length 106.6
  Top Layer, Top w0.3: v2(47.777,65.634) 47.803,65.659 58.781,65.659 v2(58.807,65.685) ; v2@58.776,65.634 v2@58.798,65.656
  Bottom Layer, Bottom w0.3: U1.23@26.713,62.762 27.413,62.762 27.783,63.132 27.783,63.135 28.682,64.033 46.177,64.033 v2(47.777,65.634) ; v2@58.754,65.632 64.46,59.925 109.179,59.925 117.725,51.379 J2.5@117.725,42.962
NetJ2_6: J2.6 U1.3 | length 115.1
  Bottom Layer, Bottom w0.3: U1.3@26.713,88.162 27.413,88.162 27.783,88.532 27.783,88.535 28.648,89.4 34.349,89.4 64.274,59.475 108.993,59.475 117.225,51.243 J2.6@117.225,42.962
NetJ2_7: J2.7 U1.4 | length 107
  Bottom Layer, Bottom w0.3: U1.4@33.213,88.162 34.95,88.162 64.087,59.025 108.807,59.025 116.725,51.107 J2.7@116.725,42.962
NetJ2_8: J2.8 U1.5 | length 112.9
  Bottom Layer, Bottom w0.3: U1.5@26.713,85.622 27.413,85.622 27.783,85.992 27.783,85.995 28.707,86.919 35.557,86.919 63.901,58.575 108.62,58.575 116.225,50.97 J2.8@116.225,42.962
NetJ2_9: J2.9 U1.6 | length 104.8
  Bottom Layer, Bottom w0.3: U1.6@33.213,85.622 36.218,85.622 63.715,58.125 108.434,58.125 115.725,50.834 J2.9@115.725,42.962
NetJ2_10: J2.10 U1.7 | length 110.7
  Bottom Layer, Bottom w0.3: U1.7@26.713,83.082 27.413,83.082 27.783,83.452 27.783,83.455 28.707,84.379 36.824,84.379 63.528,57.675 108.247,57.675 115.225,50.697 J2.10@115.225,42.962
NetJ2_11: J2.11 U1.8 | length 102.6
  Bottom Layer, Bottom w0.3: U1.8@33.213,83.082 37.485,83.082 63.342,57.225 108.061,57.225 114.725,50.561 J2.11@114.725,42.962
NetJ2_12: J2.12 U1.9 | length 108.5
  Bottom Layer, Bottom w0.3: U1.9@26.713,80.542 27.413,80.542 27.783,80.912 27.783,80.915 28.631,81.763 38.168,81.763 63.155,56.775 107.875,56.775 114.225,50.425 J2.12@114.225,42.962
NetJ2_13: J2.13 U1.10 | length 100.4
  Bottom Layer, Bottom w0.3: U1.10@33.213,80.542 38.752,80.542 62.969,56.325 107.688,56.325 113.725,50.288 J2.13@113.725,42.962
NetJ2_14: J2.14 U1.11 | length 106.3
  Bottom Layer, Bottom w0.3: U1.11@26.713,78.002 27.413,78.002 27.783,78.372 27.783,78.375 28.656,79.248 39.41,79.248 62.783,55.875 107.502,55.875 113.225,50.152 J2.14@113.225,42.962
NetJ2_15: J2.15 U1.12 | length 98.2
  Bottom Layer, Bottom w0.3: U1.12@33.213,78.002 40.019,78.002 62.596,55.425 107.315,55.425 112.725,50.015 J2.15@112.725,42.962
NetJ2_16: J2.16 U1.13 | length 104.1
  Bottom Layer, Bottom w0.3: U1.13@26.713,75.462 27.413,75.462 27.783,75.832 27.783,75.835 28.682,76.733 40.651,76.733 62.41,54.975 107.129,54.975 112.225,49.879 J2.16@112.225,42.962
NetJ2_17: J2.17 U1.14 | length 95.9
  Bottom Layer, Bottom w0.3: U1.14@33.213,75.462 41.286,75.462 62.223,54.525 106.943,54.525 111.725,49.743 J2.17@111.725,42.962
NetJ2_18: J2.18 U1.15 | length 101.9
  Bottom Layer, Bottom w0.3: U1.15@26.713,72.922 27.413,72.922 27.783,73.292 27.783,73.295 28.758,74.27 41.842,74.27 62.037,54.075 106.756,54.075 111.225,49.606 J2.18@111.225,42.962
NetJ2_19: J2.19 U1.16 | length 93.7
  Bottom Layer, Bottom w0.3: U1.16@33.213,72.922 42.554,72.922 61.851,53.625 106.57,53.625 110.725,49.47 J2.19@110.725,42.962
NetJ2_20: J2.20 U1.17 | length 99.7
  Bottom Layer, Bottom w0.3: U1.17@26.713,70.382 27.413,70.382 27.783,70.752 27.783,70.755 28.682,71.653 43.186,71.653 61.664,53.175 106.384,53.175 110.225,49.334 J2.20@110.225,42.962
NetJ2_21: J2.21 U1.18 | length 91.5
  Bottom Layer, Bottom w0.3: U1.18@33.213,70.382 43.821,70.382 61.478,52.725 106.197,52.725 109.725,49.197 J2.21@109.725,42.962
NetJ4_1: J4.1 R25.1 | length 6.3
  Bottom Layer, Bottom w0.3: J4.1@15.164,15.642 15.189,15.617 15.189,9.331 R25.1@15.18,9.322
NetJ4_5: J4.5 R30.1 U6.1 | length 23.4
  Bottom Layer, Bottom w0.3: J4.5@10.084,15.642 10.084,18.796 9.5,19.38 8.179,19.38 7.62,18.821 7.62,17.475 8.28,16.815 8.28,10.439 10.649,8.07 R30.1@10.649,5.157 U6.1@13.02,5.157
NetJ4_6: J4.6 R31.1 U7.1 | length 21.1
  Bottom Layer, Bottom w0.3: J4.6@8.814,18.182 8.814,10.592 9.119,10.287 11.099,8.306 11.099,7.29 11.786,6.604 15.596,6.604 16.445,5.754 16.445,5.414 16.802,5.057 19.087,5.057 U7.1@19.192,5.162
NetL2_1: L2.1 U2.7 | length 4.6
  Bottom Layer, Bottom w0.6: U2.7@65.971,119.685 68.222,119.685 69.18,120.643 L2.1@70.18,120.643
NetL4_1: L4.1 U4.7 | length 4.1
  Bottom Layer, Bottom w0.6: U4.7@65.971,105.329 67.303,105.329 68.52,106.546 L4.1@69.52,106.546
NetR1_2: R1.2 R2.1 U2.3 | length 18.1
  Top Layer, Top w0.254: v2(59.182,120.955) 59.855,120.955 61.455,122.555 71.473,122.555 71.626,122.403 v2(71.679,122.403)
  Bottom Layer, Bottom w0.254: v2(59.182,120.955) U2.3@60.571,120.955 ; R1.2@70.521,122.707 70.825,122.403 v2(71.679,122.403) 71.679,122.35 72.046,121.982 72.046,121.183 72.569,120.66 R2.1@72.669,120.66
NetR9_2: R9.2 R10.1 U4.3 | length 17.8
  Top Layer, Top w0.254: v2(59.182,106.599) 59.855,106.599 61.46,108.204 71.468,108.204 71.626,108.047 v2(71.679,108.047)
  Bottom Layer, Bottom w0.254: v2(59.182,106.599) U4.3@60.571,106.599 ; R9.2@70.521,108.61 71.084,108.047 v2(71.679,108.047) ; v2@71.679,107.994 72.046,107.626 72.046,107.186 R10.1@72.669,106.563
NetR11_2: R11.2 U5.1 | length 280.6
  Bottom Layer, Bottom w0.3: U5.1@68.047,15.258 68.047,14.558 68.551,14.053 108.143,14.053 108.872,13.325 210.852,13.325 216.7,19.173 216.7,50.273 229.706,63.278 229.706,97.606 232.25,100.15 269.55,100.15 271.01,98.69 R11.2@271.01,97.11
NetR12_2: R12.2 U5.2 | length 246.1
  Bottom Layer, Bottom w0.3: U5.2@66.777,15.258 66.777,16.766 66.952,16.942 68.58,16.942 68.859,16.662 68.859,14.755 69.111,14.503 108.33,14.503 109.058,13.775 210.666,13.775 216.25,19.359 216.25,50.459 229.256,63.465 229.256,93.478 227.415,95.319 221.19,95.319 220.835,95.674 R12.2@220.835,97.11
NetR13_1: R13.1 R18.2 U5.8 | length 16.3
  Bottom Layer, Bottom w0.3: R18.2@53.5,6.625 53.5,9.355 54.204,10.058 58.42,10.058 59.157,10.795 59.157,14.021 ; R13.1@56.525,14.097 59.08,14.097 59.157,14.021 ; U5.8@59.007,15.408 U5.8@59.157,15.258 59.157,14.021
NetR14_1: R14.1 R20.2 U5.5 | length 125.7
  Bottom Layer, Bottom w0.3: R14.1@52.326,16.307 52.826,16.807 52.826,17.238 53.458,17.871 61.911,17.871 62.916,16.866 62.916,15.309 U5.5@62.967,15.258 62.967,13.945 63.308,13.603 107.957,13.603 108.685,12.875 171.975,12.875 R20.2@172.975,11.875
NetR15_1: R15.1 R17.2 U5.7 | length 71.4
  Bottom Layer, Bottom w0.3: R15.1@56.525,16.307 56.525,16.407 57.025,16.907 57.125,16.907 57.189,16.971 59.414,16.971 60.427,15.958 U5.7@60.427,15.258 60.427,13.386 61.109,12.703 107.584,12.703 108.312,11.975 119.525,11.975 120.752,10.748 R17.2@120.752,7.96
NetR16_1: R16.1 R19.2 U5.6 | length 238.9
  Bottom Layer, Bottom w0.3: R16.1@52.326,14.097 52.326,14.197 53.442,15.313 53.442,17.217 53.645,17.421 60.786,17.421 61.646,16.561 61.646,15.309 U5.6@61.697,15.258 61.697,13.818 62.361,13.153 107.77,13.153 108.499,12.425 170.226,12.425 171.726,10.925 174.201,10.925 176.101,12.825 210.989,12.825 217.15,18.986 217.15,50.086 230.156,63.092 230.156,75.646 R19.2@231.461,76.952
NetR17_1: R17.1 R21.2 S3.1 S3.2 | length 16
  Top Layer, Top w2: 123.307,4.75 129.807,4.75
  Bottom Layer, Bottom w0.5: 129.807,4.75 R21.2@136.21,4.75
  Bottom Layer, Bottom w0.6: R17.1@120.752,6.06 120.852,6.06 121.856,5.056 123.001,5.056 123.307,4.75
NetR18_1: R18.1 R22.2 S2.1 S2.2 | length 12.9
  Top Layer, Top w2: 43.25,4.75 49.75,4.75
  Bottom Layer, Bottom w0.5: 49.75,4.75 49.752,4.752 R22.2@56.175,4.752
NetR19_1: R19.1 R23.2 S4.1 S4.2 | length 19
  Top Layer, Top w0.5: S4.1@224.1,75.752 229.661,75.752 v2(232.761,78.852)
  Top Layer, Top w2: S4.2@217.6,75.752 S4.1@224.1,75.752
  Bottom Layer, Bottom w0.5: R19.1@231.461,78.852 v2(232.761,78.852) R23.2@234.061,78.852
NetR20_1: R20.1 R24.2 S5.1 S5.2 | length 16.6
  Top Layer, Top w2: 163.336,4.75 169.836,4.75
  Bottom Layer, Bottom w0.5: 169.836,4.75 172.111,4.75 173.025,5.664 173.025,9.925 R20.1@172.975,9.975 175.075,9.975 R24.2@175.175,10.075
NetR21_1: R21.1 R26.2 S7.1 S7.2 | length 14
  Top Layer, Top w2: 143.321,4.75 149.821,4.75
  Bottom Layer, Bottom w0.5: R21.1@138.11,4.75 R26.2@138.11,7.061 ; R21.1@138.11,4.75 143.321,4.75
NetR22_1: R22.1 R27.2 S6.1 S6.2 | length 24.4
  Top Layer, Top w2: 63.264,4.75 69.764,4.75
  Bottom Layer, Bottom w0.5: 69.764,4.75 70.448,5.434 71.321,5.434 74.955,9.068 R27.2@78.019,9.068
  Bottom Layer, Bottom w0.6: R22.1@56.175,6.652 58.296,6.652 60.223,4.724 63.239,4.724 63.264,4.75
NetR23_1: R23.1 R28.2 S8.1 S8.2 | length 23.7
  Top Layer, Top w2: S8.2@242.65,75.752 S8.1@249.15,75.752
  Bottom Layer, Bottom w0.5: R23.1@234.061,76.952 234.161,76.952 235.361,75.752 S8.2@242.65,75.752
  Bottom Layer, Bottom w0.6: S8.1@249.15,75.752 249.159,75.743 R28.2@257.241,75.743
NetR24_1: R24.1 R29.2 S9.1 S9.2 | length 17.3
  Top Layer, Top w2: 183.35,4.75 189.85,4.75
  Bottom Layer, Bottom w0.5: R24.1@177.075,10.075 177.175,9.975 R29.2@179.225,9.975 179.225,6.043 180.518,4.75 183.35,4.75
NetR26_1: R26.1 S11.1 S11.2 | length 34.9
  Top Layer, Top w2: 103.293,4.75 109.793,4.75
  Bottom Layer, Bottom w0.3: 109.793,4.75 113.298,8.255 118.339,8.255 119.583,7.01 127.621,7.01 127.672,7.061 R26.1@136.21,7.061
NetR27_1: R27.1 S10.1 S10.2 | length 12.2
  Top Layer, Top w2: 83.279,4.75 89.779,4.75
  Bottom Layer, Bottom w0.5: R27.1@79.919,9.068 80.168,8.819 80.168,7.861 83.279,4.75
NetR28_1: R28.1 S12.1 S12.2 | length 15.1
  Top Layer, Top w2: S12.2@267.775,75.752 S12.1@274.275,75.752
  Bottom Layer, Bottom w0.6: R28.1@259.141,75.743 259.146,75.747 267.77,75.747 S12.2@267.775,75.752
NetR32_2: R32.2 U8.21 | length 5.7
  Bottom Layer, Bottom w0.3: U8.21@67.183,33.384 67.233,33.334 68.308,33.334 69.458,32.184 69.458,30.834 70.483,29.809 R32.2@70.483,29.709
NetR37_2: R37.2 U8.18 | length 5.4
  Bottom Layer, Bottom w0.3: U8.18@67.183,35.334 68.383,35.334 68.808,34.909 68.808,33.699 70.458,32.049 R37.2@70.458,31.949
NetR38_2: R38.2 U8.17 | length 4.1
  Bottom Layer, Bottom w0.3: U8.17@67.183,35.984 68.763,35.984 70.458,34.289 R38.2@70.458,34.189
NetR42_1: R42.1 U9.5 | length 3.5
  Bottom Layer, Bottom w0.254: R42.1@64.094,82.499 65.024,82.499 65.861,83.336 U9.5@67.212,83.336
NetR43_1: R43.1 U9.7 | length 3.4
  Bottom Layer, Bottom w0.254: R43.1@64.16,86.7 64.26,86.7 65.085,85.876 U9.7@67.212,85.876
NetR44_1: R44.1 U9.10 | length 2.9
  Bottom Layer, Bottom w0.3: U9.10@73.562,85.876 73.699,86.013 74.761,86.013 75.125,86.377 75.826,86.377 R44.1@76.149,86.7
NetU2_2: U2.2 U2.6 | length 12.5
  Top Layer, Top w0.254: v2(59.182,119.71) 61.595,122.123 66.192,122.123 v2(67.361,120.955)
  Bottom Layer, Bottom w0.254: v2(59.182,119.71) 59.195,119.697 60.559,119.697 U2.2@60.571,119.685 ; U2.6@65.971,120.955 v2(67.361,120.955)
NetU4_2: U4.2 U4.6 | length 12.5
  Top Layer, Top w0.254: v2(59.182,105.354) 61.625,107.798 66.162,107.798 v2(67.361,106.599)
  Bottom Layer, Bottom w0.254: v2(59.182,105.354) 59.195,105.342 60.559,105.342 U4.2@60.571,105.329 ; U4.6@65.971,106.599 v2(67.361,106.599)
POWER_SW: P1.3 S1.1 S1.2 | length 44.2
  Top Layer, Top w2: S1.2@8.739,108.951 S1.1@15.239,108.951
  Bottom Layer, Bottom w0.3: S1.1@15.239,108.951 15.239,105.462 22.784,97.917 43.612,97.917 44.176,97.353 44.176,95.938 P1.3@44.526,95.588
PTT: C25.2 D4.1 J2.46 J7.6 R25.2 | length 184.9
  Bottom Layer, Bottom w0.3: C25.2@19.422,9.322 R25.2@17.18,9.322 17.18,16.926 17.986,17.732 22.111,17.732 23.725,19.346 23.725,41.474 20.834,44.365 9.715,44.365 J7.6@8.1,42.75 4.3,42.75 D4.1@3.75,42.2 3.75,42.225 1.925,44.05 1.925,57.85 2.6,58.525 21.75,58.525 22.694,57.581 22.694,51.156 25.978,47.872 94.251,47.872 97.225,44.898 J2.46@97.225,42.962
PTT_SW1: U5.3 U6.3 U6.4 | length 69.4
  Bottom Layer, Bottom w0.3: U6.4@14.92,2.864 14.92,4.057 ; U6.3@14.92,5.264 14.92,4.057 ; U5.3@65.507,15.258 65.507,17.882 64.618,18.771 28.651,18.771 26.619,16.739 26.619,4.233 26.443,4.057 14.92,4.057
PTT_SW2: U5.4 U7.3 U7.4 | length 63.8
  Top Layer, Top w0.3: v2(21.092,6.086) 21.092,3.761 v2(21.741,3.112)
  Bottom Layer, Bottom w0.3: U7.4@21.092,2.762 21.092,2.962 21.242,3.112 26.135,3.112 27.069,4.046 27.069,16.552 28.838,18.321 63.398,18.321 64.237,17.482 U5.4@64.237,15.258 ; U7.3@21.092,5.162 v2(21.092,6.086)
R+: P2.1 U9.16 | length 4.4
  Bottom Layer, Bottom w0.3: U9.16@73.562,78.256 74.208,78.256 74.358,78.106 P2.1@74.358,74.582
R-: P2.2 U9.14 | length 9.3
  Bottom Layer, Bottom w0.3: P2.2@72.358,74.582 72.358,75.832 70.764,77.426 70.764,80.239 71.323,80.797 73.561,80.797 U9.14@73.562,80.796
T_INT: J2.38 U1.30 | length 94.6
  Bottom Layer, Bottom w0.3: U1.30@33.213,55.142 32.513,55.142 31.555,56.1 30.35,56.1 29.85,55.6 29.85,54.7 29.25,54.1 25.7,54.1 25.051,53.451 25.051,52.14 25.489,51.702 29.056,51.702 30.323,52.969 30.323,52.975 30.85,53.502 34.939,53.502 38.416,50.025 96.986,50.025 101.225,45.786 J2.38@101.225,42.962
T_SCL: J2.41 U1.32 | length 72.7
  Bottom Layer, Bottom w0.3: U1.32@33.213,52.602 35.203,52.602 38.23,49.575 96.8,49.575 99.725,46.65 J2.41@99.725,42.962
T_SDA: J2.35 U1.31 | length 82.4
  Bottom Layer, Bottom w0.3: U1.31@26.713,52.602 27.413,52.602 27.783,52.972 27.783,52.975 28.31,53.502 30.166,53.502 30.806,54.142 34.936,54.142 38.603,50.475 97.201,50.475 102.725,44.951 J2.35@102.725,42.962
WM8731_ADC_SD: J2.52 U8.6 | length 54.4
  Bottom Layer, Bottom w0.3: U8.6@59.983,32.084 61.592,32.084 64.083,29.594 64.083,25.674 65.624,24.132 86.925,24.132 94.225,31.432 J2.52@94.225,42.962
WM8731_BCLK: J2.49 U8.3 | length 56.4
  Bottom Layer, Bottom w0.3: U8.3@59.983,30.134 61.633,30.134 62.733,29.034 62.733,25.114 65.065,22.782 87.485,22.782 95.725,31.023 J2.49@95.725,42.962
WM8731_DAC_SD: J2.50 U8.4 | length 55.8
  Bottom Layer, Bottom w0.3: U8.4@59.983,30.784 61.62,30.784 63.183,29.221 63.183,25.301 65.251,23.232 87.298,23.232 95.225,31.159 J2.50@95.225,42.962
WM8731_SCK: J2.54 U8.24 | length 41.2
  Bottom Layer, Bottom w0.3: U8.24@67.183,31.434 67.233,31.384 68.233,31.384 68.558,31.059 68.558,29.174 69.548,28.184 89.704,28.184 93.225,31.705 J2.54@93.225,42.962
WM8731_SDA: J2.55 U8.23 | length 40.5
  Bottom Layer, Bottom w0.3: U8.23@67.183,32.084 67.233,32.034 68.22,32.034 69.008,31.246 69.008,29.36 69.709,28.659 89.543,28.659 92.725,31.841 J2.55@92.725,42.962
WM8731_WS_LRC: J2.51 U8.5 U8.7 | length 59
  Bottom Layer, Bottom w0.3: U8.7@59.983,32.734 58.808,32.734 58.508,32.434 58.508,31.684 58.758,31.434 61.606,31.434 63.633,29.407 63.633,25.487 65.438,23.682 87.112,23.682 94.725,31.296 J2.51@94.725,42.962
pads on no net: ENC1.6 ENC1.7 J1.1 J1.2 J1.4 J1.5 J1.6 J1.7 J1.13 J1.14 J2.24 J2.25 J2.26 J2.57 J2.58 J2.59 J2.60 J3.4 J3.5 J3.MH1 J4.7 J4.8 J6.4 J6.5 J6.MH1 J7.4 J7.5 J7.MH1 J8.MH1 R11.4 R11.5 R12.4 R12.5 S1.5 S2.5 S3.5 S4.5 S5.5 S6.5 S7.5 S8.5 S9.5 S10.5 S11.5 S12.5 U1. U1.0 U1.1 U1.24 U1.27 U1.28 U1.29 U6. U7. U8.2 U8.12 U8.13 U8.26

## Polygon pours and split planes (outlines as drawn)
GND on Top Layer, Top "GND_L01_P000" (solid, remove dead copper, pour order 0): 0.006,124.003 cw(c4.013,124.003) 4.013,128.01 275.996,128.01 cw(c275.996,124.003) 280.003,124.003 280.003,67.282 cw(c275.996,67.282) 275.996,63.275 245.9,63.275 ccw(c245.9,37.575) 220.2,37.575 220.2,4.013 cw(c216.193,4.013) 216.193,0.006 4.013,0.006 cw(c4.013,4.013) 0.006,4.013
GND on Bottom Layer, Bottom "GND_L02_P001" (solid, remove dead copper, pour order 1): 0.006,124.003 cw(c4.013,124.003) 4.013,128.01 275.996,128.01 cw(c275.996,124.003) 280.003,124.003 280.003,67.282 cw(c275.996,67.282) 275.996,63.275 245.9,63.275 ccw(c245.9,37.575) 220.2,37.575 220.2,4.013 cw(c216.193,4.013) 216.193,0.006 4.013,0.006 cw(c4.013,4.013) 0.006,4.013

## Keep-outs
Keep-Out Layer, Board:
  lines w0.2: 275.996,63.275 245.9,63.275 ccw(c245.9,37.575) 220.2,37.575 220.2,4.013 cw(c216.193,4.013) 216.193,0.006 4.013,0.006 cw(c4.013,4.013) 0.006,4.013 0.006,124.003 cw(c4.013,124.003) 4.013,128.01 275.996,128.01 cw(c275.996,124.003) 280.003,124.003 280.003,67.285 cw(c275.996,67.285) 275.996,63.278
  lines w0.254: 93.21,99.125 106.725,99.125 106.725,106.05 93.21,106.05 93.21,99.125

## Other copper
Bottom Layer, Bottom:
  rectangle net +13.8: 39.294,117.627 51.638,122.758
  rectangle net +13.8: 48.031,93.853 51.714,104.369
  rectangle net +5: 79.527,106.731 85.954,117.246
  rectangle net +3V3: 85.014,82.423 89.891,87.554
  rectangle net +3V3: 29.185,34.239 36.043,34.976
  rectangle net +3V3: 29.185,29.388 31.471,34.976
  rectangle net +5: 29.185,36.906 36.093,44.044
  rectangle net +LCD_3V3: 82.042,99.435 85.954,103.835
  rectangle net +5: 82.042,113.64 85.954,117.246
  rectangle net +13.8: 59.436,98.476 61.57,104.419
  rectangle net +13.8: 45.644,102.768 51.765,118.72
  rectangle net +13.8: 48.082,100.457 61.57,104.419
  rectangle net +13.8: 45.644,113.03 61.595,118.72
  region net 5V: 76.429,110.471 76.429,117.253 70.764,117.253 70.764,110.471
  region net NetC22_1: 76.429,96.368 76.429,103.149 70.764,103.149 70.764,96.368

## Silkscreen, mask and mechanical layers (free items; w line width, h text height)
Top Overlay:
  lines w0.254: 25,125.5 55.297,125.5 ; 35,123.5 201.06,123.5 ; 38,120.5 52.449,120.5 ; 55.499,120.523 61.062,120.523 ; 59.715,125.476 82.22,125.476 ; 65.634,120.523 86.411,120.523 ; 86.614,125.501 211.059,125.501 211.06,125.5 ; 89.56,120.523 89.583,120.5 195.06,120.5
  text "SHIFT" at 215.773,113.309 h4
  text "AF GAIN" at 263.983,113.309 h4
  text "ON/OFF" at 5.408,103.042 h4
  text "LINEIN" at 6.507,91.034 h4
  text "A/B" at 218.057,86.106 h4
  text "MODE+" at 239.718,86.106 h4
  text "BAND+" at 265.237,86.106 h4
  text "A=B" at 217.508,82.931 h4
  text "MODE-" at 240.124,82.931 h4
  text "BAND-" at 265.643,82.931 h4
  text "HEADPHONE" at 0.901,76.886 h4
  text "WOLF" at 141.199,68.758 h20
  text "KEY" at 8.563,62.941 h4
  text "UA3REO" at 145.974,59.792 h10
  text "LZ1HAA" at 155.956,54 h5
  text "MIC+PTT" at 4.461,49.098 h4
  text "MH-36/MH-48" at 0.965,32.639 h4
  text "B" at 9.195,10.897 h1.5 r90
  text "A" at 10.464,10.897 h1.5 r90
  text "+5V" at 11.749,10.897 h1.5 r90
  text "GND" at 13.051,10.897 h1.5 r90
  text "MIC" at 14.352,10.897 h1.5 r90
  text "PTT" at 15.621,10.897 h1.5 r90
  text "F1" at 44.886,0.508 h4
  text "F2" at 64.666,0.508 h4
  text "F3" at 84.668,0.508 h4
  text "F4" at 104.687,0.508 h4
  text "F5" at 124.687,0.508 h4
  text "F6" at 144.711,0.508 h4
  text "F7" at 164.725,0.508 h4
  text "F8" at 184.736,0.508 h4
Bottom Overlay:
  lines w1: 6.985,11.074 5.156,7.722 ; 8.509,9.55 5.156,7.722 ; 8.661,117.831 6.833,121.183 ; 9.22,62.332 7.391,65.684 ; 10.185,119.355 6.833,121.183 ; 10.744,63.856 7.391,65.684 ; 12.319,10.693 8.128,10.693 5.156,7.722 ; 13.995,118.212 9.804,118.212 6.833,121.183 ; 14.554,62.713 10.363,62.713 7.391,65.684 ; 68.174,11.354 72.365,11.354 75.336,8.382 ; 71.984,10.211 75.336,8.382 ; 73.508,11.735 75.336,8.382 ; 108.407,11.354 112.598,11.354 115.57,8.382 ; 112.217,10.211 115.57,8.382 ; 113.741,11.735 115.57,8.382 ; 148.641,11.354 152.832,11.354 155.804,8.382 ; 152.451,10.211 155.804,8.382 ; 153.975,11.735 155.804,8.382 ; 206.223,9.804 210.414,9.804 213.385,6.833 ; 206.223,73.076 210.414,73.076 213.385,70.104 ; 210.033,8.661 213.385,6.833 ; 210.033,71.933 213.385,70.104 ; 211.557,10.185 213.385,6.833 ; 211.557,73.457 213.385,70.104 ; 220.853,117.831 219.024,121.183 ; 222.377,119.355 219.024,121.183 ; 226.187,118.212 221.996,118.212 219.024,121.183 ; 266.014,73.076 270.205,73.076 273.177,70.104 ; 266.014,118.212 270.205,118.212 273.177,121.183 ; 269.824,71.933 273.177,70.104 ; 269.824,119.355 273.177,121.183 ; 271.348,73.457 273.177,70.104 ; 271.348,117.831 273.177,121.183
  text "+13.8V" at 51.689,82.677 h5
  text "WOLF" at 187.477,68.783 h20
  text "Encoder" at 239.014,65.735 h5
  text "7' LCD" at 36.271,64.186 h5 r270
  text "SPEAKER" at 80.747,61.112 h5
  text "WI-FI" at 99.695,61.062 h5
  text "UA3REO" at 181.458,59.842 h10
  text "LZ1HAA" at 172.542,54 h5
  text "MOTHERBOARD" at 122.123,47.981 h5
Bottom Solder, Bot Mask:
  lines w3: 53.914,98.654 53.914,93.091 87.914,93.091 87.914,103.073 ; 53.914,120.218 53.914,125.808 87.914,125.808 87.914,110.947 ; 53.924,107.975 53.924,110.947 ; 87.924,107.213 87.924,110.947
Mechanical 1, Top Assy:
  circle w0.254: c30.84,23.4 r3.5
  circle w0.254: c30.33,117.5 r3.5

## Dimensions
4.013,128.01 to 4.013,0.006 on Mechanical 13
216.205,4.013 to 220.2,4.013 on Mechanical 1, Top Assy
12.004,33 to 0,0 on Mechanical 1, Top Assy
116.561,4.013 to 76.327,4.013 on Mechanical 1, Top Assy
116.561,4.013 to 156.794,4.013 on Mechanical 1, Top Assy
156.794,4.013 to 216.205,4.013 on Mechanical 1, Top Assy
4.013,4.013 to 216.205,4.013 on Mechanical 1, Top Assy
4.013,4.013 to 0,0 on Mechanical 1, Top Assy
0,128.01 to 4.013,124.003 on Mechanical 1, Top Assy
280,63.275 to 275.996,67.285 on Mechanical 1, Top Assy
275.996,124.003 to 275.996,67.285 on Mechanical 1, Top Assy
275.996,124.003 to 216.205,124.003 on Mechanical 1, Top Assy
280,128.01 to 275.996,124.003 on Mechanical 1, Top Assy
280,128.01 to 275.996,124.003 on Mechanical 1, Top Assy
12,70 to 12,84 on Mechanical 1, Top Assy
12,56 to 12,70 on Mechanical 1, Top Assy
12,42 to 12,56 on Mechanical 1, Top Assy
0,0 to 12,42 on Mechanical 1, Top Assy